# Altium PCB MICROMOUSE.PcbDoc
Units mm, origin at the board's own origin, x right, y up, seen from the top; angles counter-clockwise.
Board outline 70 x 91.65 mm, 2 copper layers (Top Layer, Bottom Layer); 84 components, 67 nets, 270 pads, 90 vias.
Unrouted connection lines stored in the file: 35.
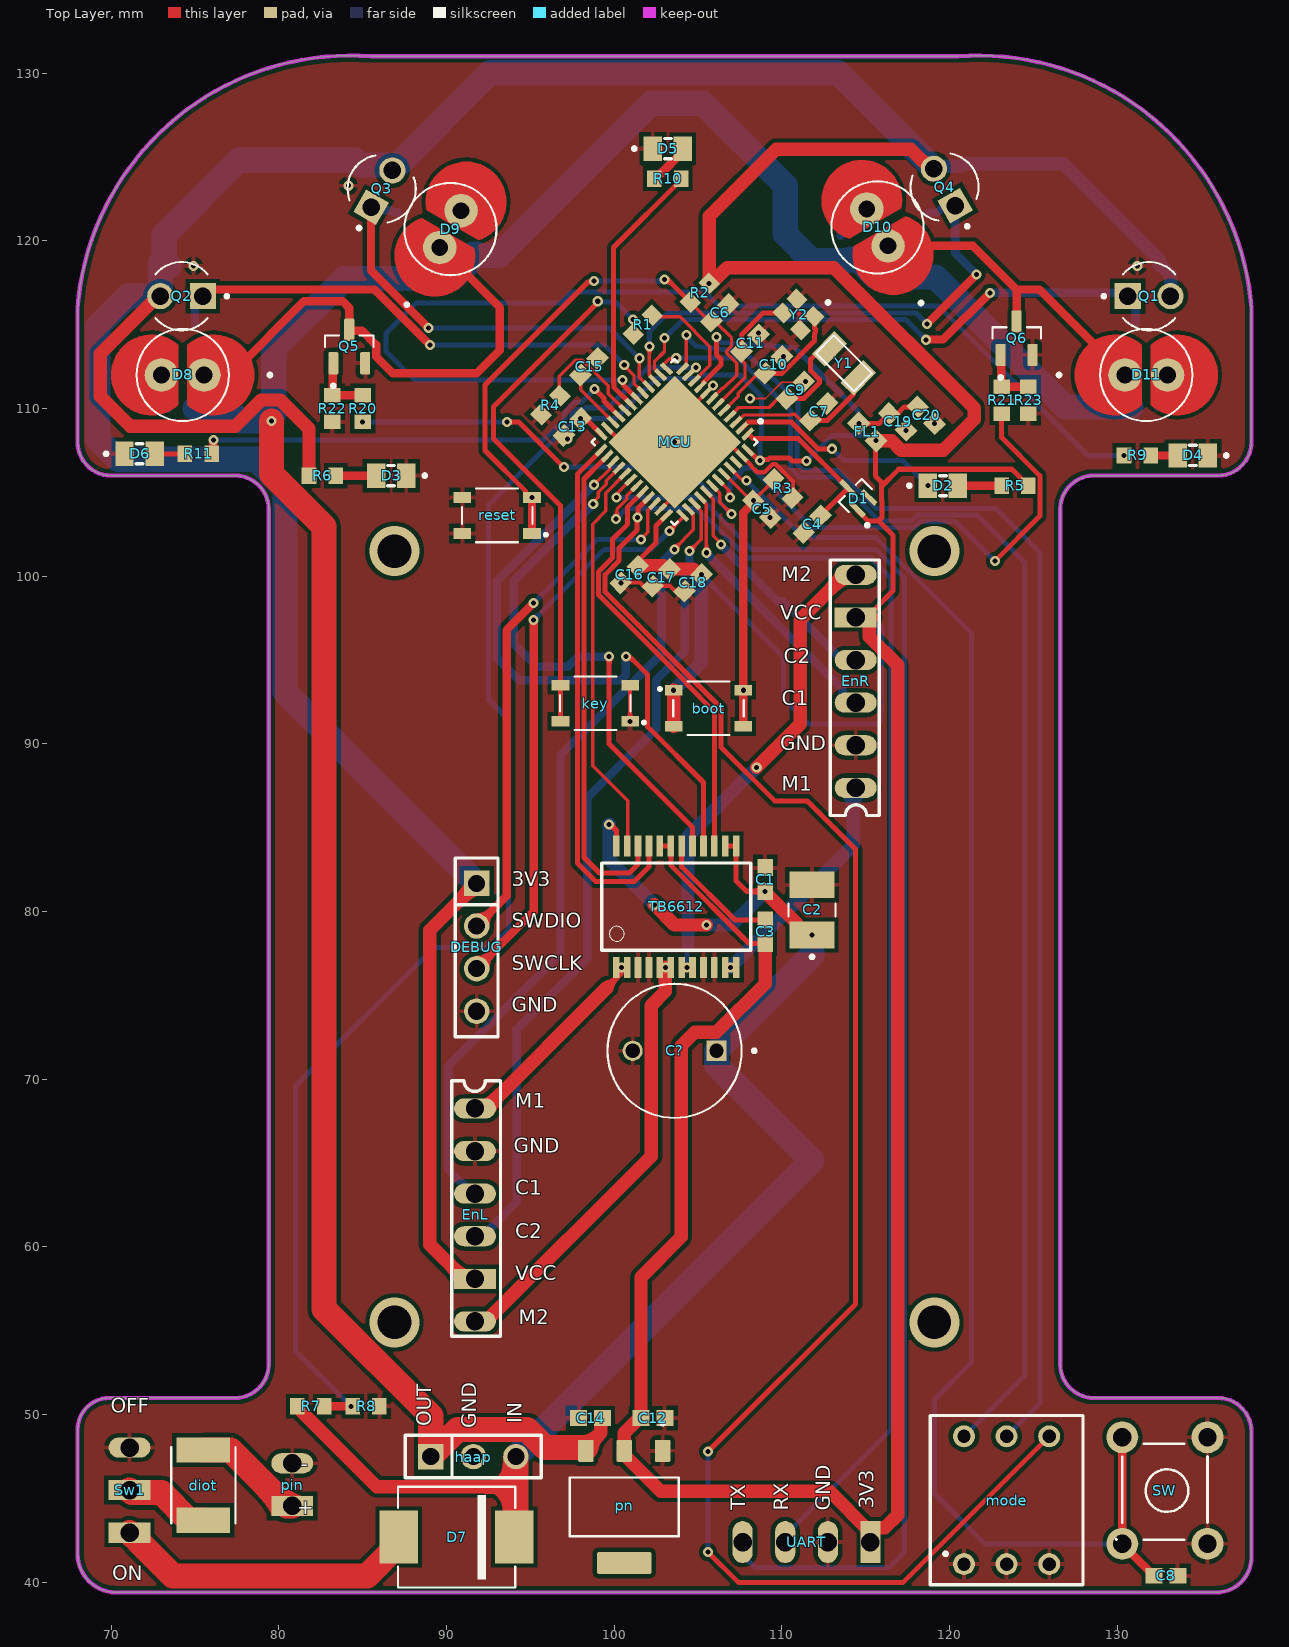
[diagram p0: Top Layer view]
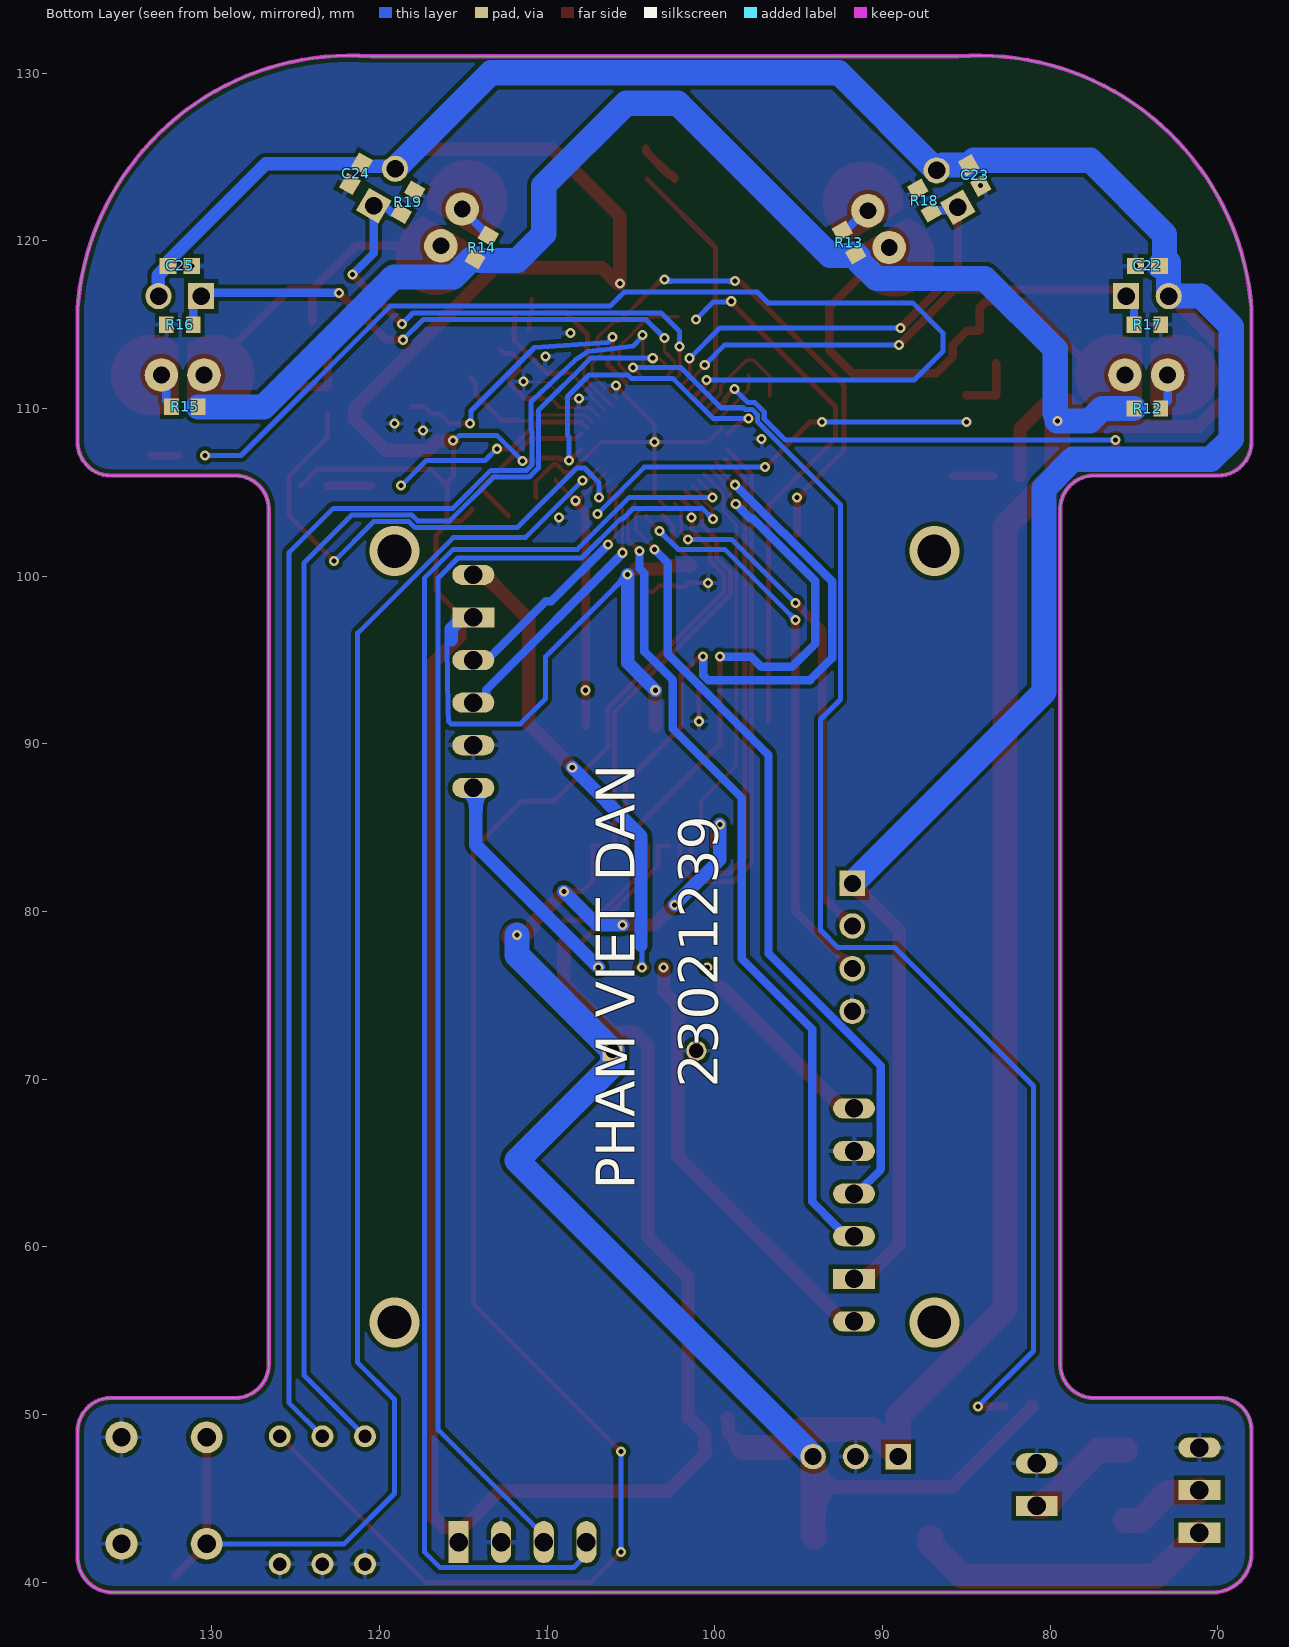
[diagram p1: Bottom Layer view, seen from below]
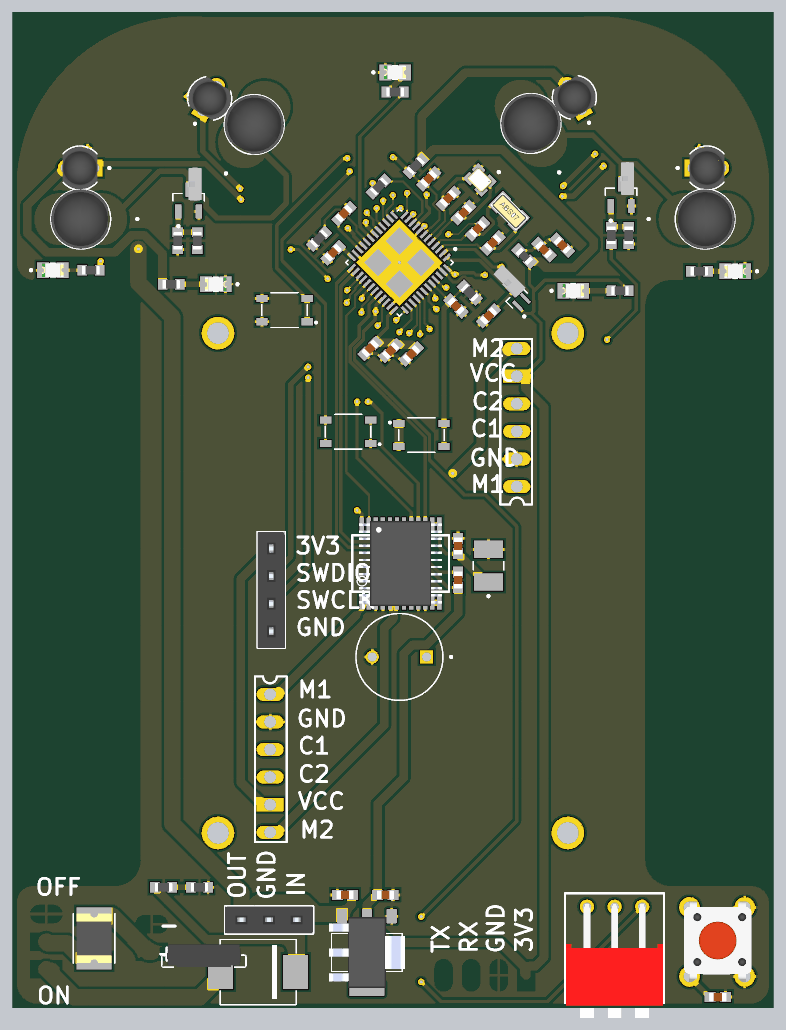
[diagram p2: 3D render of the assembled board from above, using the file's embedded part models]
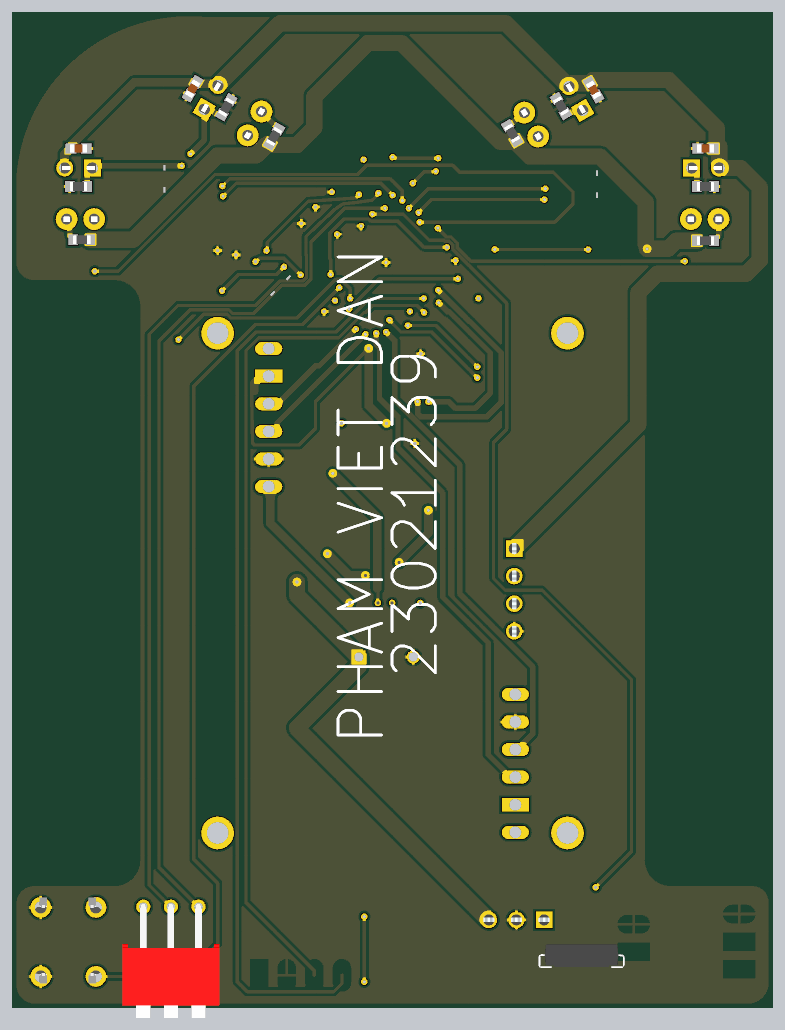
[diagram p3: 3D render of the assembled board from below, using the file's embedded part models]

## Layer stack, top to bottom
Top Solder: solder mask 0.0102, Solder Resist, Dk 3.5
Top Layer: signal copper 0.0356
Dielectric 1: dielectric 0.32, FR-4, Dk 4.8
Bottom Layer: signal copper 0.0356
Bottom Solder: solder mask 0.0102, Solder Resist, Dk 3.5

## Board outline
68,41.7 68,49.1 cw(c69.9,49.1) 69.9,51 77.4,51 ccw(c77.4,53) 79.4,53 79.4,104 ccw(c77.4,104) 77.4,106 70,106 cw(c70,108) 68,108 68,116 cw(c84.25,114.75) 85.5,131 120.5,131 cw(c121.75,114.75) 138,116 138,108 cw(c136,108) 136,106 128.6,106 ccw(c128.6,104) 126.6,104 126.6,53 ccw(c128.6,53) 128.6,51 136,51 cw(c136,49) 138,49 138,41.5 cw(c135.9,41.5) 135.9,39.4 70.3,39.4 cw(c70.3,41.7)

## Design rules (kind name [scope] priority, off if disabled: settings)
Clearance [All] p1: gap=0.1 ignorepadtopadclearanceinfootprint=FALSE except(0: Arc-Hole Track-Hole SMDPad-Hole THPad-Hole Via-Hole Text-Hole; 0.254: Arc-Fill Arc-Poly Arc-Region Track-Fill Track-Poly Track-Region SMDPad-Fill SMDPad-Poly SMDPad-Region THPad-Fill THPad-Poly THPad-Region Via-Fill Via-Poly Via-Region Fill-Fill Fill-Poly Fill-Region Poly-Poly Poly-Region Region-Region)
PolygonConnect [All] p1: connectstyle=Relief reliefconductorwidth=0.254 reliefentries=4 polygonreliefangle="90 Angle" airgapwidth=0.254
RoutingVias [All] p1: holewidth=0.711 width=1.27 viastyle="Through Hole" minholewidth=0.711 minwidth=1.27 maxholewidth=0.711 maxwidth=1.27
SolderMaskExpansion [All] p1: expansion=0.102 istentingtop=FALSE
Width signal [InNetClass('signal')] p1: maxlimit=0.5 minlimit=0.2 preferedwidth=0.3
Width gnd [InNetClass('gnd')] p2: maxlimit=2 minlimit=0.1 preferedwidth=0.254
Width power [InNetClass('power')] p3: maxlimit=1.5 minlimit=0.3 preferedwidth=0.8
30 further rules are at their usual default settings.

## Components (designator, comment, footprint, x,y, rotation, side; value= is the part's Value field where it differs from the comment)
boot "SKRPACE010" SW_SKRPACE010 105.625,92.125 r0 top
C1 "C1608C0G1H100C080AA" CAPC1608X90N 109,81.909 r90 top
C2 "6TPE220MAZB" CAP_6TPE220MAZB 111.8,80.1 r90 top
C3 "C1608C0G1H100C080AA" CAPC1608X90N 109,78.791 r270 top
C4 "C1608C0G1H100C080AA" CAPC1608X90N 111.8,103.1 r225 top
C5 "C1608C0G1H100C080AA" CAPC1608X90N 108.8,104 r315 top
C6 "C1608C0G1H100C080AA" CAPC1608X90N 106.3,115.7 r45 top
C7 "C1608C0G1H100C080AA" CAPC1608X90N 112.2,109.8 r225 top
C8 "C1608C0G1H100C080AA" CAPC1608X90N 132.9,40.4 r180 top
C9 "C1608C0G1H100C080AA" CAPC1608X90N 110.8,111.1 r225 top
C10 "C1608C0G1H100C080AA" CAPC1608X90N 109.5,112.6 r225 top
C11 "C1608C0G1H100C080AA" CAPC1608X90N 108.101,113.901 r225 top
C12 "C1608C0G1H100C080AA" CAPC1608X90N 102.309,49.8 r180 top
C13 "C1608C0G1H100C080AA" CAPC1608X90N 97.5,108.9 r45 top
C14 "C1608C0G1H100C080AA" CAPC1608X90N 98.591,49.8 r0 top
C15 "C1608C0G1H100C080AA" CAPC1608X90N 98.5,112.5 r45 top
C16 "C1608C0G1H100C080AA" CAPC1608X90N 100.899,100.099 r45 top
C17 "C1608C0G1H100C080AA" CAPC1608X90N 102.799,99.899 r45 top
C18 "C1608C0G1H100C080AA" CAPC1608X90N 104.699,99.599 r45 top
C19 "C1608C0G1H100C080AA" CAPC1608X90N 116.9,109.2 r135 top
C20 "C1608C0G1H100C080AA" CAPC1608X90N 118.6,109.6 r135 top
C22 "C1608C0G1H100C080AA" CAPC1608X90N 74.2,118.5 r0 bottom
C23 "C1608C0G1H100C080AA" CAPC1608X90N 84.5,123.9 r240 bottom
C24 "C1608C0G1H100C080AA" CAPC1608X90N 121.4,124 r300 bottom
C25 "C1608C0G1H100C080AA" CAPC1608X90N 131.9,118.5 r180 bottom
C? "ECA1CHG471B" CAPPRD500W60D800H1150 103.6,71.7 r180 top
D1 "BAT54CTA" SOT50P160X90-3N 114.383,104.81 r135 top
D2 "597-3305-607F" LEDC2012X70N 119.6,105.4 r0 top
D3 "597-3305-607F" LEDC2012X70N 86.7,106 r180 top
D4 "597-3305-607F" LEDC2012X70N 134.5,107.2 r180 top
D5 "597-3305-607F" LEDC2012X70N 103.2,125.5 r0 top
D6 "597-3305-607F" LEDC2012X70N 71.7,107.3 r0 top
D7 "SS34" DO214AB 90.6,42.7 r180 top
D8 "SFH_4545" DIO_SFH_4545 74.27,112 r180 top
D9 "SFH_4545" DIO_SFH_4545 90.235,120.7 r60 top
D10 "SFH_4545" DIO_SFH_4545 115.7,120.8 r120 top
D11 "SFH_4545" DIO_SFH_4545 131.73,112 r0 top
DEBUG "JP4" JP4-C1T 91.8,81.68 r270 top
diot "MF-MSMF150/24X-2" FUSER_MF-MSMF150/24X-2 75.5,45.8 r90 top
EnL "Encoder" Encoder 91.7,68.26 r0 top
EnR "Encoder" Encoder 114.4,87.38 r180 top
FL1 "BLM18AG601SN1D" BEADC1608X95N 115.1,108.6 r315 top
haap "JP3" JP3-C1T 89.06,47.5 r0 top
key "SKRPACE010" SW_SKRPACE010 98.875,92.425 r180 top
MCU "STM32F411CEU6" QFN50P700X700X60-49N 103.6,108 r225 top
mode "418117270903" 418117270903 123.4,44.9 r0 top
pin "Pin" Pin 149.38,41.385 r180 top
pn "AMS1117-3.3" SOT229P700X180-4N 100.6,44.5 r270 top
Q1 "TEFT4300" XDCR_TEFT4300 131.9,116.7 r0 top
Q2 "TEFT4300" XDCR_TEFT4300 74.2,116.7 r180 top
Q3 "TEFT4300" XDCR_TEFT4300 86.135,123.1 r60 top
Q4 "TEFT4300" XDCR_TEFT4300 119.7,123.2 r120 top
Q5 "BC817-40" SOT95P240X120-3N 84.2,113.7 r90 top
Q6 "BC817-40" SOT95P240X120-3N 124,114.2 r90 top
R1 "ERJ-P03J510V" RESC1608X55N 101.7,115 r45 top
R2 "ERJ-P03J510V" RESC1608X55N 105.1,116.9 r45 top
R3 "ERJ-P03J510V" RESC1608X55N 110.066,105.234 r315 top
R4 "ERJ-P03J510V" RESC1608X55N 96.2,110.2 r225 top
R5 "ERJ-P03J510V" RESC1608X55N 123.9,105.4 r180 top
R6 "ERJ-P03J510V" RESC1608X55N 82.6,106 r0 top
R7 "ERJ-P03J510V" RESC1608X55N 81.9,50.5 r0 top
R8 "ERJ-P03J510V" RESC1608X55N 85.2,50.5 r0 top
R9 "ERJ-P03J510V" RESC1608X55N 131.2,107.2 r180 top
R10 "ERJ-P03J510V" RESC1608X55N 103.2,123.7 r0 top
R11 "ERJ-P03J510V" RESC1608X55N 75.2,107.3 r0 top
R12 "ERJ-P03J510V" RESC1608X55N 74.2,110 r0 bottom
R13 "ERJ-P03J510V" RESC1608X55N 92,119.9 r240 bottom
R14 "ERJ-P03J510V" RESC1608X55N 113.9,119.6 r300 bottom
R15 "ERJ-P03J510V" RESC1608X55N 131.6,110.1 r180 bottom
R16 "ERJ-P03J510V" RESC1608X55N 131.9,115 r180 bottom
R17 "ERJ-P03J510V" RESC1608X55N 74.2,115 r0 bottom
R18 "ERJ-P03J510V" RESC1608X55N 87.5,122.4 r240 bottom
R19 "ERJ-P03J510V" RESC1608X55N 118.3,122.3 r300 bottom
R20 "ERJ-P03J510V" RESC1608X55N 85,110 r270 top
R21 "ERJ-P03J510V" RESC1608X55N 123.1,110.5 r270 top
R22 "ERJ-P03J510V" RESC1608X55N 83.2,110 r90 top
R23 "ERJ-P03J510V" RESC1608X55N 124.7,110.5 r90 top
reset "SKRPACE010" SW_SKRPACE010 93.025,103.625 r180 top
SW "SW" SW4 135.38,48.65 r270 top value="Button chip 4 pin"
Sw1 "Switch" Switch 131.566,288.324 r180 top
TB6612 "TB6612FNG" SSOP24 103.7,80.3 r0 top
UART "Pin4x" Pin4x 177.213,500.374 r270 top
Y1 "ABS07-LR-32.768KHZ-6-T" XTAL320X150X90 113.7,112.7 r315 top
Y2 "FA-128_25.0000MF10Z-AC" XTAL_FA-128_25.0000MF10Z-AC 111,115.6 r225 top

## Footprints (in the part's own frame and the unit in brackets; to place one, negate y for a bottom-side part, rotate by r counter-clockwise, add the part's x,y. Pads: shape width x height; smd on the part's side, far side on the other; paste and mask are expansions set on the pad)
418117270903 [mm]
  round 1.308 hole 0.8: 1(-2.54,-3.81) 2(0,-3.81) 3(2.54,-3.81) A1(-2.54,3.81) A2(0,3.81) A3(2.54,3.81)
  silkscreen extent -4.56,-5.05 4.56,5.05, body extent -4.46,-6.45 4.46,4.1, height 4.95
BEADC1608X95N [mm]
  rect 1x0.97 smd: 1(-0.735,0) 2(0.735,0)
  body extent -0.8,-0.4 0.8,0.4, height 0.95
CAP_6TPE220MAZB [mm]
  rect 1.6x2.7 smd: 1(-1.5,0) 2(1.5,0)
  silkscreen extent -2.9,-1.4 0.38,1.4
CAPC1608X90N [mm]
  rect 1.01x0.93 smd: 1(-0.709,0) 2(0.709,0)
  body extent -0.8,-0.4 0.8,0.4, height 0.9
CAPPRD500W60D800H1150 [mm]
  round 1.2 hole 0.85: N(2.5,0)
  rect 1.2x1.2 hole 0.85: P(-2.5,0)
  silkscreen extent -4.85,-4 4,4
DIO_SFH_4545 [mm]
  round 2 hole 1: A(1.27,0) C(-1.27,0)
  Top Layer region: -1.768,2.399 -1.71,2.396 -1.652,2.392 -1.593,2.387 -1.535,2.38 -1.478,2.371 -1.42,2.361 -1.363,2.35 -1.306,2.337 -1.249,2.323 -1.193,2.307 -1.137,2.29 -1.081,2.272 -1.026,2.252 -0.972,2.231 -0.918,2.209 -0.864,2.185 -0.812,2.16 -0.76,2.133 -0.708,2.105 -0.657,2.076 -0.608,2.046 -0.558,2.014 -0.51,1.982 -0.462,1.948 -0.416,1.912 -0.37,1.876 -0.325,1.839 -0.27,1.79 -0.27,0.06 -0.27,-1.79 -0.325,-1.839 -0.37,-1.876 -0.416,-1.912 -0.462,-1.948 -0.51,-1.982 -0.558,-2.014 -0.608,-2.046 -0.657,-2.076 -0.708,-2.105 -0.76,-2.133 -0.812,-2.16 -0.864,-2.185 -0.918,-2.209 -0.972,-2.231 -1.026,-2.252 -1.081,-2.272 -1.137,-2.29 -1.193,-2.307 -1.249,-2.323 -1.306,-2.337 -1.363,-2.35 -1.42,-2.361 -1.478,-2.371 -1.535,-2.38 -1.593,-2.387 -1.652,-2.392 -1.71,-2.396 -1.768,-2.399 -1.827,-2.4 -1.895,-2.4 -2.028,-2.394 -2.152,-2.383 -2.275,-2.364 -2.398,-2.34 -2.519,-2.309 -2.638,-2.272 -2.755,-2.229 -2.869,-2.179 -2.981,-2.124 -3.09,-2.063 -3.195,-1.997 -3.297,-1.925 -3.396,-1.848 -3.49,-1.766 -3.579,-1.68 -3.664,-1.589 -3.745,-1.493 -3.82,-1.394 -3.89,-1.29 -3.954,-1.184 -4.013,-1.074 -4.066,-0.961 -4.114,-0.846 -4.155,-0.728 -4.19,-0.608 -4.219,-0.487 -4.241,-0.364 -4.257,-0.241 -4.267,-0.116 -4.27,0 -4.267,0.116 -4.257,0.241 -4.241,0.364 -4.219,0.487 -4.19,0.608 -4.155,0.728 -4.114,0.846 -4.066,0.961 -4.013,1.074 -3.954,1.184 -3.89,1.29 -3.82,1.394 -3.745,1.493 -3.664,1.589 -3.579,1.68 -3.49,1.766 -3.396,1.848 -3.297,1.925 -3.195,1.997 -3.09,2.063 -2.981,2.124 -2.869,2.179 -2.755,2.229 -2.638,2.272 -2.519,2.309 -2.398,2.34 -2.275,2.364 -2.152,2.383 -2.028,2.394 -1.895,2.4 -1.827,2.4
  Top Layer region: 2.028,2.394 2.152,2.383 2.275,2.364 2.398,2.34 2.519,2.309 2.638,2.272 2.755,2.229 2.869,2.179 2.981,2.124 3.09,2.063 3.195,1.997 3.297,1.925 3.396,1.848 3.49,1.766 3.579,1.68 3.664,1.589 3.745,1.493 3.82,1.394 3.89,1.29 3.954,1.184 4.013,1.074 4.066,0.961 4.114,0.846 4.155,0.728 4.19,0.608 4.219,0.487 4.241,0.364 4.257,0.241 4.267,0.116 4.27,0 4.267,-0.116 4.257,-0.241 4.241,-0.364 4.219,-0.487 4.19,-0.608 4.155,-0.728 4.114,-0.846 4.066,-0.961 4.013,-1.074 3.954,-1.184 3.89,-1.29 3.82,-1.394 3.745,-1.493 3.664,-1.589 3.579,-1.68 3.49,-1.766 3.396,-1.848 3.297,-1.925 3.195,-1.997 3.09,-2.063 2.981,-2.124 2.869,-2.179 2.755,-2.229 2.638,-2.272 2.519,-2.309 2.398,-2.34 2.275,-2.364 2.152,-2.383 2.028,-2.394 1.895,-2.4 1.827,-2.4 1.768,-2.399 1.71,-2.396 1.652,-2.392 1.593,-2.387 1.535,-2.38 1.478,-2.371 1.42,-2.361 1.363,-2.35 1.306,-2.337 1.249,-2.323 1.193,-2.307 1.137,-2.29 1.081,-2.272 1.026,-2.252 0.972,-2.231 0.918,-2.209 0.864,-2.185 0.812,-2.16 0.76,-2.133 0.708,-2.105 0.657,-2.076 0.608,-2.046 0.558,-2.014 0.51,-1.982 0.462,-1.948 0.416,-1.912 0.37,-1.876 0.325,-1.839 0.27,-1.79 0.27,0.06 0.27,1.79 0.325,1.839 0.37,1.876 0.416,1.912 0.462,1.948 0.51,1.982 0.558,2.014 0.608,2.046 0.657,2.076 0.708,2.105 0.76,2.133 0.812,2.16 0.864,2.185 0.918,2.209 0.972,2.231 1.026,2.252 1.081,2.272 1.137,2.29 1.193,2.307 1.249,2.323 1.306,2.337 1.363,2.35 1.42,2.361 1.478,2.371 1.535,2.38 1.593,2.387 1.652,2.392 1.71,2.396 1.768,2.399 1.827,2.4 1.895,2.4
  silkscreen extent -5.3,-2.75 2.75,2.75, body extent -2.5,-2.76 2.75,2.75, height 11.84
DO214AB [mm]
  rect 2.3x3.15 smd paste+0 mask+0.102: A(3.45,0) C(-3.45,0)
  silkscreen extent -3.5,-3 3.5,3, body extent 1.05,-2.58 8.95,-0.38, height 2.8
Encoder [mm]
  oval 2.5x1.2 hole 1.1: C1(0,-5.08) C2(0,-7.62) GND(0,-2.54) M1(0,0) M2(0,-12.7)
  rect 2.5x1.2 hole 1.1: VCC(0,-10.16)
  silkscreen extent -1.4,-13.59 1.52,1.65
FUSER_MF-MSMF150/24X-2 [mm]
  rect 1.5x3.2 smd: 1(-2.1,0) 2(2.1,0)
  silkscreen extent -2.27,-1.91 2.27,1.91, body extent -2.27,-1.62 2.27,1.62, height 0.85
JP3-C1T [mm] "3 row, straight, gold plating"
  rect 1.52x1.52 hole 1.02: 1(0,0)
  round 1.52 hole 1.02: 2(2.54,0) 3(5.08,0)
  silkscreen extent -1.52,-1.27 6.6,1.27, body extent -1.52,-1.25 6.6,1.25, height 8.51
JP4-C1T [mm] "4 row, straight, gold plating"
  rect 1.52x1.52 hole 1.02: 1(0,0)
  round 1.52 hole 1.02: 2(2.54,0) 3(5.08,0) 4(7.62,0)
  silkscreen extent -1.52,-1.27 9.14,1.27, body extent -1.52,-1.25 9.14,1.25, height 8.51
LEDC2012X70N [mm]
  rect 1.1x1.45 smd: A(0.9,0) C(-0.9,0)
  silkscreen extent -2.1,-0.6 0.2,0.6, body extent -1,-0.63 1,0.63, height 0.7
Pin [mm]
  rect 2.5x1.2 hole 1.1: 1(68.58,-3.175)
  oval 2.5x1.2 hole 1.1: 2(68.58,-5.715)
  body extent 65.62,-8.32 71.37,-0.82, height 7
Pin4x [mm]
  rect 2.5x1.2 hole 1.1: 1(457.974,-61.933)
  oval 2.5x1.2 hole 1.1: 2(457.974,-64.473) 3(457.974,-67.013) 4(457.974,-69.553)
  body extent 456.71,-70.72 459.21,-60.72, height 9
QFN50P700X700X60-49N [mm]
  rrect25% 0.87x0.27 smd: 1(-3.43,2.75) 2(-3.43,2.25) 3(-3.43,1.75) 4(-3.43,1.25) 5(-3.43,0.75) 6(-3.43,0.25) 7(-3.43,-0.25) 8(-3.43,-0.75) 9(-3.43,-1.25) 10(-3.43,-1.75) 11(-3.43,-2.25) 12(-3.43,-2.75) 25(3.43,-2.75) 26(3.43,-2.25) 27(3.43,-1.75) 28(3.43,-1.25) 29(3.43,-0.75) 30(3.43,-0.25) 31(3.43,0.25) 32(3.43,0.75) 33(3.43,1.25) 34(3.43,1.75) 35(3.43,2.25) 36(3.43,2.75)
  rrect25% 0.27x0.87 smd: 13(-2.75,-3.43) 14(-2.25,-3.43) 15(-1.75,-3.43) 16(-1.25,-3.43) 17(-0.75,-3.43) 18(-0.25,-3.43) 19(0.25,-3.43) 20(0.75,-3.43) 21(1.25,-3.43) 22(1.75,-3.43) 23(2.25,-3.43) 24(2.75,-3.43) 37(2.75,3.43) 38(2.25,3.43) 39(1.75,3.43) 40(1.25,3.43) 41(0.75,3.43) 42(0.25,3.43) 43(-0.25,3.43) 44(-0.75,3.43) 45(-1.25,3.43) 46(-1.75,3.43) 47(-2.25,3.43) 48(-2.75,3.43)
  rect 5.6x5.6 smd paste-4: 49(0,0)
  silkscreen extent -4.6,-3.5 3.5,3.5
RESC1608X55N [mm]
  rect 0.87x0.98 smd: 1(-0.8,0) 2(0.8,0)
  body extent -0.8,-0.4 0.8,0.4, height 0.45
SOT50P160X90-3N [mm]
  rect 1.16x0.3 smd paste+0 mask+0.102: 1(-0.655,0.5) 2(-0.655,-0.5) 3(0.655,0)
  silkscreen extent -1.85,-0.97 0.43,0.97, body extent 0,-1.2 3.04,0.1, height 2
SOT95P240X120-3N [mm]
  rrect25% 1.32x0.6 smd paste+0 mask+0.102: 1(-1,0.95) 2(-1,-0.95) 3(1,0)
  silkscreen extent -2.45,-1.45 0.65,1.45, body extent 0,-1.2 3.04,0.1, height 2
SOT229P700X180-4N [mm]
  rrect15% 1.31x0.93 smd: 1(-3.345,2.29) 2(-3.345,0) 3(-3.345,-2.29)
  rrect15% 1.31x3.24 smd: 4(3.345,0)
  silkscreen extent -5.1,-3.25 1.75,3.25, body extent -3.25,-3.5 3.25,3.5, height 1.8
SSOP24 [mm]
  rect 0.4x1.25 smd: 1(-3.575,-3.625) 2(-2.925,-3.625) 3(-2.275,-3.625) 4(-1.625,-3.625) 5(-0.975,-3.625) 6(-0.325,-3.625) 7(0.325,-3.625) 8(0.975,-3.625) 9(1.625,-3.625) 10(2.275,-3.625) 11(2.925,-3.625) 12(3.575,-3.625) 13(3.575,3.625) 14(2.925,3.625) 15(2.275,3.625) 16(1.625,3.625) 17(0.975,3.625) 18(0.325,3.625) 19(-0.325,3.625) 20(-0.975,3.625) 21(-1.625,3.625) 22(-2.275,3.625) 23(-2.925,3.625) 24(-3.575,3.625)
  silkscreen extent -4.45,-2.6 4.45,2.6, body extent -3.8,-3.9 3.8,3.9, height 1.6
SW4 [mm]
  round 1.905 hole 1.1: 1(0,0) 2(6.35,-5.08) 3(6.35,0) 4(0,-5.08)
  silkscreen extent 0.38,-5.46 6.1,0, body extent -0.9,-5.59 7,0.61, height 7
SW_SKRPACE010 [mm]
  rect 1.05x0.65 smd: 1(-2.075,1.075) 2(2.075,1.075) 3(-2.075,-1.075) 4(2.075,-1.075)
  silkscreen extent -3.01,-1.6 2.1,1.6
Switch [mm]
  rect 2.5x1.2 hole 1.1: 1(60.466,245.364) 2(60.466,242.824)
  oval 2.5x1.2 hole 1.1: 3(60.466,240.284)
  body extent 58.51,238.65 62.36,247.26, height 5.45
XDCR_TEFT4300 [mm]
  round 1.56 hole 1.04: C(1.27,0)
  rect 1.56x1.56 / inner round 1.56 / far side rect 1.56x1.56 hole 1.04: E(-1.27,0)
  silkscreen extent -2.8,-2.03 1.55,2.03, body extent -1.6,-1.95 1.6,1.95, height 6.1
XTAL320X150X90 [mil]
  rect 43x75 smd: 1(-48,0) 2(48,0)
  silkscreen extent -63,-30 63,30, body extent -63,-29 63,29, height 35
XTAL_FA-128_25.0000MF10Z-AC [mm]
  rect 0.85x0.95 smd: 1(-0.575,0.725) 2(-0.575,-0.725) 3(0.575,-0.725) 4(0.575,0.725)
  silkscreen extent -1.85,0.63 -1.65,0.82, body extent -0.8,-1 0.8,1, height 0.5

## Part data
boot key reset: "Switch Tactile N.O. SPST Button J-Bend 0.05A 16VDC 2.55N SMD Automotive T/R", Package=None, Availability=Good, Check_prices=https://www.snapeda.com/parts/SKRPACE010/ALPS/view-part/376136/?ref=eda, MF=ALPS, MP=SKRPACE010, Price=None, SnapEDA_Link=https://www.snapeda.com/parts/SKRPACE010/ALPS/view-part/376136/?ref=snap
C1 C3 C4 C5 C6 C7 C8 C9 C10 C11 C12 C13 C14 C15 C16 C17 C18 C19 C20 C22 C23 C24 C25: "C Series 0603 10 pF 50 V Â±0.25 pF Tolerance C0G SMT Multilayer Ceramic Capacitor", Package="1608 TDK", Check_prices=https://www.snapeda.com/parts/C1608C0G1H100C080AA/TDK/view-part/?ref=eda, MF=TDK, MP=C1608C0G1H100C080AA, SnapEDA_Link=https://www.snapeda.com/parts/C1608C0G1H100C080AA/TDK/view-part/?ref=snap
C2: Package=None, Availability=Unavailable, MP=6TPE220MAZB, Price=None
C?: "NHG-A", Package=None, Availability=Unavailable, MP=ECA1CHG471B, Price=None
D1: "200mA 30V Schottky Barrier Diode SOT-23", Package="SOT-23 Diodes Inc.", Check_prices=https://www.snapeda.com/parts/BAT54CTA/Diodes+Inc./view-part/?ref=eda, MF="Diodes Inc.", MP=BAT54CTA, SnapEDA_Link=https://www.snapeda.com/parts/BAT54CTA/Diodes+Inc./view-part/?ref=snap
D2 D3 D4 D5 D6: "LED Uni-Color Green 4-Pin Chip 0805 T/R", Package=None, Availability=Unavailable, MP=597-3305-607F, Price=None
D7: "Diode Schottky 40 V 3A Surface Mount SMA", Package="SMC-2 ON Semiconductor", Check_prices=https://www.snapeda.com/parts/SS34/MDD/view-part/?ref=eda, MF=MDD, MP=SS34, SnapEDA_Link=https://www.snapeda.com/parts/SS34/MDD/view-part/?ref=snap
D8 D9 D10 D11: "Infrared (IR) Emitter 950nm 1.5V 100mA 550mW/sr @ 100mA 10Â° Radial", Package=None, Check_prices=https://www.snapeda.com/parts/SFH%204545/OSRAM/view-part/?ref=eda, MF="OSRAM Opto", MP="SFH 4545", SnapEDA_Link=https://www.snapeda.com/parts/SFH%204545/OSRAM/view-part/?ref=snap
DEBUG: "WR-PHD 2.54 mm Angled Socket Header", Manufacturer="W¨¹rth Elektronik eiSos GmbH", partNo=613004143121, ComponentLink1 Description=Manufacturer, ComponentLink1URL=http://www.we-online.com, ComponentLink2 Description=Datasheet, ComponentLink2URL=http://katalog.we-online.de/em/datasheet/6130xx143121.pdf, Created by="Karrer Zheng", Created Date="29 March 2013", NoPins=04
diot: "Polymeric PTC Resettable Fuse 24V 1.5 A Ih Surface Mount 1812 (4532 Metric), Concave", Package="1812 Bourns", Check_prices=https://www.snapeda.com/parts/MF-MSMF150/24X-2/Bourns/view-part/?ref=eda, Digi-Key_Part_Number=MF-MSMF150/24X-2TR-ND, MF=Bourns, MP=MF-MSMF150/24X-2, Purchase-URL=https://pricing.snapeda.com/search/part/MF-MSMF150/24X-2/?ref=eda, SnapEDA_Link=https://www.snapeda.com/parts/MF-MSMF150/24X-2/Bourns/view-part/?ref=snap
FL1: "600 Ohms @ 100 MHz 1 - Ferrite Bead 0603 (1608 Metric) 500mA 380mOhm", Package="1608 Murata", Availability="In Stock", Check_prices=https://www.snapeda.com/parts/BLM18AG601SN1D/Murata/view-part/?ref=eda, MF=Murata, MP=BLM18AG601SN1D, Price=None, Purchase-URL=https://pricing.snapeda.com/search/part/BLM18AG601SN1D/?ref=eda, SnapEDA_Link=https://www.snapeda.com/parts/BLM18AG601SN1D/Murata/view-part/?ref=snap
haap: "WR-PHD 2.54 mm Angled Socket Header", Manufacturer="W¨¹rth Elektronik eiSos GmbH", partNo=613003143121, ComponentLink1 Description=Manufacturer, ComponentLink1URL=http://www.we-online.com, ComponentLink2 Description=Datasheet, ComponentLink2URL=http://katalog.we-online.de/em/datasheet/6130xx143121.pdf, Created by="Karrer Zheng", Created Date="29 March 2013", NoPins=03
MCU: "High-performance access line, ARM Cortex-M4 core with DSP and FPU, 512 Kbytes Flash, 100 MHz CPU, ART Accelerator", Package=None, Availability=Unavailable, MP=STM32F411CEU6, Price=None
mode: "Dip Switch SPST 3 Position Through Hole Slide (Standard) Actuator 25mA 24VDC", Package=None, Check_prices=https://www.snapeda.com/parts/418117270903/W%25C3%25BCrth+Elektronik+Midcom/view-part/?ref=eda, MF="WÃ¼rth Elektronik", MP=418117270903, SnapEDA_Link=https://www.snapeda.com/parts/418117270903/W%25C3%25BCrth+Elektronik+Midcom/view-part/?ref=snap
pn: "Sot223/Pkg 1-Amp 3.3-Volt Low Drop Out Voltage Regulatator", Package="SOT-223 Seeed Technology", Check_prices=https://www.snapeda.com/parts/AMS1117-3.3/Advanced+Monolithic+Systems/view-part/?ref=eda, MF="Advanced Monolithic Systems", MP=AMS1117-3.3, SnapEDA_Link=https://www.snapeda.com/parts/AMS1117-3.3/Advanced+Monolithic+Systems/view-part/?ref=snap
Q1 Q2 Q3 Q4: "Phototransistors 925nm Top View Radial, 3mm Dia (T-1)", Package=None, Check_prices=https://www.snapeda.com/parts/TEFT4300/Vishay/view-part/?ref=eda, MF="Vishay Semiconductor", MP=TEFT4300, SnapEDA_Link=https://www.snapeda.com/parts/TEFT4300/Vishay/view-part/?ref=snap
Q5 Q6: "BJT, SOT-23, 45V, 800mA, NPN, 0.31W, 150Â°C", Package="SOT-23 Diotec", Check_prices=https://www.snapeda.com/parts/BC817-40/Diotec/view-part/?ref=eda, MF="Diotec Semiconductor", MP=BC817-40, SnapEDA_Link=https://www.snapeda.com/parts/BC817-40/Diotec/view-part/?ref=snap
R1 R2 R3 R4 R5 R6 R7 R8 R9 R10 R11 R12 R13 R14 R15 R16 R17 R18 R19 R20 R21 R22 R23: "Anti-Surge Chip Resistor 0603 5%, 51ohm , T&R", Package="1608-2 Panasonic", Check_prices=https://www.snapeda.com/parts/ERJ-P03J510V/Panasonic/view-part/?ref=eda, MF=Panasonic, MP=ERJ-P03J510V, SnapEDA_Link=https://www.snapeda.com/parts/ERJ-P03J510V/Panasonic/view-part/?ref=snap
SW: library part SW4, "Switch button 4 pin"
TB6612: "- Motor Driver Power MOSFET Parallel 24-SSOP", Package=None, Check_prices=https://www.snapeda.com/parts/TB6612FNG/Toshiba/view-part/?ref=eda, MF=Toshiba, MP=TB6612FNG, SnapEDA_Link=https://www.snapeda.com/parts/TB6612FNG/Toshiba/view-part/?ref=snap
Y1: "32.768 kHz Â±20ppm Crystal 6pF 50 kOhms 2-SMD, No Lead", Package="SMD-2 Abracon", Check_prices=https://www.snapeda.com/parts/ABS07-LR-32.768KHZ-6-T/Abracon/view-part/?ref=eda, MF=Abracon, MP=ABS07-LR-32.768KHZ-6-T, SnapEDA_Link=https://www.snapeda.com/parts/ABS07-LR-32.768KHZ-6-T/Abracon/view-part/?ref=snap
Y2: "25 MHz Â±10ppm Crystal 9pF 80 Ohms 4-SMD, No Lead", Package="NON STANDARD-4 EPSON", Availability="In Stock", Check_prices=https://www.snapeda.com/parts/FA-128%2025.0000MF10Z-AC/EPSON/view-part/?ref=eda, MF=EPSON, MP="FA-128 25.0000MF10Z-AC", Price=None, Purchase-URL="https://pricing.snapeda.com/search/part/FA-128 25.0000MF10Z-AC/?ref=eda", SnapEDA_Link=https://www.snapeda.com/parts/FA-128%2025.0000MF10Z-AC/EPSON/view-part/?ref=snap

## Via types
v1: diameter 0.6, hole 0.3, Top Layer to Bottom Layer, 86 vias
v2: diameter 3, hole 2, Top Layer to Bottom Layer, 4 vias

## Nets (pads, with @x,y where several pads share a name; then routed paths per layer and width w, separated by ;. In a path a pad name is that pad's centre, name@x,y a point inside that pad or via, vN(x,y) a via of type N, cw(c..) or ccw(c..) an arc to the next point about the centre after c; other vN are vias at no path point)
3V3: boot.1 boot.3 C3.2 C12.2 C13.2 C16.2 C17.2 C18.2 C22.1 C23.1 C24.1 C25.1 D1.1 DEBUG.1 EnL.VCC EnR.VCC FL1.2 MCU.24 MCU.36 MCU.48 pn.2 Q1.C Q2.C Q3.C Q4.C R2.2 R5.1 R6.1 TB6612.19 TB6612.20 UART.1 | length 432.9
  Top Layer w0.3: v1(98.001,109.401) 98.299,109.401 99.219,108.481 MCU.24 ; C16.2 101.428,100.628 101.428,100.928 102.493,101.993 102.493,103.004 MCU.36 ; TB6612.20 TB6612.19 103.375,82.759 108.034,78.1 C3.2@108.982,78.1 ; MCU.48 107.991,107.519 108.553,106.957 108.643,106.957 v1(108.7,106.9) 108.757,106.957 109.188,106.957 109.289,107.058 110.425,107.058 110.622,106.861 v1(111.461,106.861) ; D1.1 114.52,103.965 114.509,103.954 114.509,103.921 115.127,103.304 115.765,103.304 ; EnR.VCC@115.05,97.54 115.5,97.99 115.5,98 116.63,99.13 116.63,102.44 115.765,103.304 ; v1(115.62,108.08) 115.571,107.655 115.571,105.974 115.941,105.604 115.941,105.355 ; R5.1 123.721,106.379 116.965,106.379 115.941,105.355 ; 115.765,103.304 115.966,103.505 115.966,104.499 115.941,104.525 115.941,105.355
  Top Layer w0.8: Q2.C 72.786,116.7 69.346,113.26 69.346,110.74 71.14,108.946 77.4,108.946 78.961,110.507 80.092,110.507 81.8,108.799 R6.1 ; EnL.VCC 91.05,58.1 89,60.15 89,78.88 DEBUG.1 ; pn.2@100.541,47.659 102.776,45.424 112.851,45.424 UART.1@115.28,42.995 ; pn.2 100.606,48.1 100.606,48.909 C12.2@101.495,49.798 ; C16.2@101.428,100.628 C17.2@102.923,100.628 ; C12.2 101.6,58.2 104,60.6 104,72 104.8,72.8 106.093,72.8 109,75.707 C3.2 C3.2@108.982,78.1 ; C17.2 103.328,100.428 104.723,100.428 ; boot.3 v1(103.55,93.2) ; UART.1@115.1,42.995 115.1,42.58 UART.1 115.28,43.05 115.48,43.25 116.13,43.25 116.9,44.02 116.9,94.706 115.206,96.399 115.206,97.34 115.006,97.54 EnR.VCC EnR.VCC@115.36,97.54 ; v1(115.62,108.08) 115.63,108.07 116.551,108.07 117.107,107.513 119.613,107.513 121.469,109.369 121.469,110.031 117.487,114.013 ; 117.486,114.013 113.099,118.4 106.727,118.4 105.754,117.427 105.705,117.427 v1(105.666,117.466) 105.666,121.466 109.67,125.47 117.689,125.47 118.859,124.3 Q4.C
  Bottom Layer w0.3: v1(98.001,109.401) 100.101,109.401 102.5,111.8 104.994,111.8 105.194,112 107.5,112 108.781,110.719 108.781,108.391 108.7,108.309 v1(108.7,106.9) ; v1(105.2,100.1) 110.1,95.2 110.1,92.7 111.6,91.2 115.724,91.2 115.844,91.32 115.883,91.376 115.9,92.108 115.969,95.784 115.969,96.033 115.793,96.209 115.719,96.209 ; v1(111.461,106.861) 113,108.4 115.219,108.4 115.539,108.08 v1(115.62,108.08)
  Bottom Layer w0.8: v1(103.55,93.2) 105.2,94.85 v1(105.2,100.1) ; EnR.VCC 115.05,97.54 115.719,96.871 115.719,96.209 ; Q4.C 119.21,124.445 C24.1@120.621,124.445 ; C24.1 121.066,124.594 126.774,124.594 132.504,118.864 132.504,118.565 132.569,118.5 C25.1 132.649,118.5 133.2,117.949 133.2,116.73 Q1.C
  Bottom Layer w1.5: 72.941,118.705 72.941,116.711 Q2.C 71,116.7 69.2,114.9 69.2,108.182 70.405,106.977 76.476,106.977 78.633,106.977 80.377,105.233 80.377,101.095 80.377,93.103 DEBUG.1 ; C22.1 73.173,118.818 73.173,120.373 77.606,124.806 84.563,124.806 C23.1 Q3.C@86.44,124.514 ; Q3.C 92.593,130.023 113.342,130.023 Q4.C
5V: C14.2 haap.1 pn.3 R12.2 R13.2 R14.2 R15.2 | length 153.6
  Top Layer w0.8: pn.3@98.31,48.035 99.195,48.92 99.195,49.735 99.26,49.8 C14.2
  Top Layer w1.5: v1(79.574,109.257) 79.574,106.099 82.7,102.973 82.7,56.3 89.06,49.94 haap.1 90.67,49.11 94.807,49.11 95.882,48.035 pn.3@98.31,48.035
  Bottom Layer w1.5: R12.2 76.915,110 77.659,109.257 v1(79.574,109.257) ; 79.7,109.7 79.7,113.544 83.906,117.75 90.366,117.75 91.45,118.834 91.45,119.057 R13.2 91.81,119.207 91.896,119.121 93.121,119.121 102.2,128.2 105.3,128.2 110.2,123.3 110.2,120.4 111.779,118.821 114.004,118.821 114.09,118.907 114.512,118.907 115.569,117.85 119.15,117.85 126.9,110.1 R15.2
7.4V: C1.1 C2.1 C?.P D7.C haap.3 R7.1 TB6612.13 TB6612.14 TB6612.24 | length 87.4
  Top Layer w0.3: v1(99.7,85.2) 99.781,85.2 100.081,84.9 100.1,84.9 100.125,84.875 TB6612.24 ; TB6612.14 TB6612.13 107.275,81.825 107.9,81.2 v1(109,81.2)
  Top Layer w0.8: R7.1 81.1,50.445 85.845,45.7 94.136,45.7 ; v1(102.4,80.4) 103.6,79.2 v1(105.5,79.2) ; C1.1 109,81.16 109.655,80.505 109.672,80.505 110.85,79.327 110.85,79 111.25,78.6 v1(111.8,78.6)
  Top Layer w1.5: D7.C 94.136,42.786 94.136,45.7 94.136,47.496 haap.3 ; v1(111.8,78.6) 111.95,78.6 C2.1@112,78.55
  Bottom Layer w0.8: v1(99.7,85.2) 99.7,83.1 v1(102.4,80.4) ; v1(105.5,79.2) 107,79.2 v1(109,81.2)
  Bottom Layer w1.5: haap.3 111.8,65.16 106.1,70.86 C?.P 111.8,77.4 v1(111.8,78.6)
A1: MCU.13 mode.A1 | length 83
  Top Layer w0.2: MCU.13 102.919,112.57 102.919,112.619 103.276,112.976 103.676,112.976 v1(103.7,113)
  Bottom Layer w0.3: v1(103.7,113) 107.4,113 110.511,109.889 110.511,106.468 111.068,105.911 113.189,105.911 115.8,103.3 117.72,103.3 118.07,103.65 121.65,103.65 124.5,100.8 124.5,52.35 mode.A1
A2: MCU.12 mode.A2 | length 84.2
  Top Layer w0.2: MCU.12 104.293,112.582 104.293,113.413 104.3,113.42 v1(104.3,114.386)
  Bottom Layer w0.3: v1(104.3,114.386) 104.3,114.305 104.677,113.927 104.677,113.915 104.802,113.79 104.828,113.765 104.853,113.739 106.216,113.542 107.566,113.4 108.294,112.91 110.866,110.513 110.87,110.509 110.958,110.421 110.958,108.708 110.911,108.662 110.911,106.633 111.233,106.311 113.355,106.311 115.616,104.05 122.75,104.05 125.4,101.4 125.4,50.71 mode.A2
A3: MCU.33 mode.A3 | length 99.6
  Top Layer w0.3: MCU.33 101.433,104.065 101.433,103.533 v1(101.4,103.5) 101.372,103.472 101.372,102.75 100.3,101.678 100.3,100.934 99.461,100.096 99.461,99.058 106.375,92.144 106.375,89.806 109.575,86.606 111.494,86.606 114.4,83.7 114.4,56.6 v1(105.6,47.8) ; v1(105.6,41.8) 107.4,40 117.23,40 mode.A3
  Bottom Layer w0.3: v1(105.6,41.8) v1(105.6,47.8)
AIN1: MCU.26 TB6612.21 | length 31.6
  Top Layer w0.3: 99.23,107.519 97.8,106.089 97.8,82.9 98.9,81.8 101.2,81.8 102.075,82.675 TB6612.21
AIN2: MCU.25 TB6612.22 | length 29.2
  Top Layer w0.3: 99.373,106.973 98.2,105.8 98.2,83.222 99.122,82.3 100.9,82.3 101.425,82.825 TB6612.22
BIN1: MCU.28 TB6612.17 | length 33
  Top Layer w0.2: v1(98.75,104.3) 98.75,104.408 99.05,104.708 99.05,105.006 99.532,105.488 99.532,105.7 MCU.28
  Top Layer w0.3: v1(99.7,95.2) 99.7,90 104.675,85.025 TB6612.17
  Bottom Layer w0.5: v1(98.75,104.3) 97.906,103.456 97.756,103.456 94,99.7 94,96 95.4,94.6 97.236,94.6 97.836,95.2 v1(99.7,95.2)
BIN2: MCU.27 TB6612.16 | length 37.4
  Top Layer w0.2: v1(98.791,105.453) 99.725,106.388 99.725,106.6 MCU.27
  Top Layer w0.3: v1(100.7,95.2) 100.757,95.143 100.985,95.143 102,94.127 102,91.022 105.325,87.697 TB6612.16
  Bottom Layer w0.5: v1(98.791,105.453) 95.9,102.562 95.862,102.562 93,99.7 93,95.111 94.311,93.8 100.4,93.8 100.7,94.1 v1(100.7,95.2)
BOOT: boot.2 boot.4 C5.1 MCU.44 R3.1 | length 17.9
  Top Layer w0.2: MCU.44 108.159,104.501 v1(108.299,104.501) 109.5,105.703 R3.1
  Top Layer w0.5: boot.4 v1(107.7,93.2) 107.7,103.796 108.327,104.423 C5.1@108.327,104.473
BUTTON: C8.2 MCU.45 SW.2 SW.4 | length 92.2
  Top Layer w0.2: MCU.45 107.591,105.777 107.823,105.777 v1(107.9,105.7)
  Top Layer w0.5: SW.4 SW.2 130.3,42.251 132.151,40.4 C8.2
  Bottom Layer w0.3: v1(107.9,105.7) 111.3,102.3 115.6,102.3 121.3,96.6 121.3,53.1 119.1,50.9 119.1,45.3 122.1,42.3 SW.2
D4: MCU.18 R9.2 | length 66.4
  Top Layer w0.3: v1(100.507,111.703) 100.557,111.652 100.557,111.396 MCU.18
  Bottom Layer w0.3: v1(100.507,111.703) 100.495,111.715 88.085,111.715 86.4,113.4 86.4,114.5 88.2,116.3 96.829,116.3 97.477,116.948 105.406,116.948 106.254,116.1 119.36,116.1 128.26,107.2 v1(130.4,107.2)
D5: MCU.19 R10.2 | length 15.6
  Top Layer w0.3: MCU.19 100,111.246 100,111.489 99.957,111.532 99.957,119.602 104,123.645 R10.2
D6: MCU.21 R11.2 | length 27.3
  Top Layer w0.3: v1(98.835,111.165) 99.388,110.612 99.388,110.444 MCU.21
  Top Layer w0.5: R11.2 76.081,107.381 76.081,108.108 v1(76.1,108.127)
  Bottom Layer w0.3: v1(76.1,108.127) 95.798,108.127 97.051,109.381 97.051,109.795 97.608,110.351 98.022,110.351 v1(98.835,111.165)
ENL1: EnL.C1 MCU.38 | length 47.7
  Top Layer w0.2: v1(103.6,101.6) 103.6,101.641 104.718,102.759 104.718,103.651 104.434,103.934 MCU.38
  Bottom Layer w0.5: EnL.C1 91.55,63.18 90.1,64.63 90.1,70.79 96.8,77.49 96.8,89.349 102.8,95.349 102.8,100.8 v1(103.6,101.6)
ENL2: EnL.C2 MCU.39 | length 49.7
  Top Layer w0.2: v1(104.5,101.5) 105.2,102.2 105.2,103.876 104.788,104.288 MCU.39
  Bottom Layer w0.5: EnL.C2 92.161,60.64 92.7,61.179 92.7,61.2 94.2,62.7 94.2,73 98.4,77.2 98.4,86.8 102.5,90.9 102.5,93.8 104.2,95.5 104.2,100.161 104.489,100.45 104.489,101.489 v1(104.5,101.5)
ENR1: EnR.C1 MCU.40 | length 16.3
  Top Layer w0.2: MCU.40 105.141,104.641 105.5,104.283 v1(105.5,101.4)
  Bottom Layer w0.5: v1(105.5,101.4) 105.519,101.381 105.519,101.341 113.62,93.24 113.62,92.783 113.944,92.46 EnR.C1
ENR2: EnR.C2 MCU.41 | length 14.4
  Top Layer w0.2: MCU.41 105.495,104.995 105.9,104.59 105.9,102.4 106.378,101.922 v1(106.378,101.878)
  Bottom Layer w0.5: v1(106.378,101.878) 109.76,98.497 110.085,98.497 113.581,95 EnR.C2
GND: C1.2 C2.2 C4.2 C5.2 C6.2 C7.1 C8.1 C9.1 C10.1 C11.1 C12.1 C13.1 C14.1 C15.2 C16.1 C17.1 C18.1 C19.1 C20.1 C22.2 C23.2 C24.2 C25.2 C?.N D3.C D4.C D5.C D6.C DEBUG.4 EnL.GND EnR.GND haap.2 key.1 key.3 MCU.8 MCU.23 MCU.35 MCU.47 MCU.49 mode.1 mode.2 mode.3 pin.2 pn.1 Q5.2 Q6.2 R3.2 R4.2 R8.2 R16.1 R17.1 R18.1 R19.1 R22.1 R23.1 reset.2 reset.4 Sw1.3 SW.1 SW.3 TB6612.3 TB6612.4 TB6612.9 TB6612.10 UART.2 Y2.2 Y2.4 | length 34.4
  Top Layer w0.1: v1(108.1,110.6) 109.024,110.6 109.997,111.573 111.373,111.573 v1(111.4,111.6)
  Top Layer w0.254: MCU.23 100.418,108 v1(103.6,108) ; v1(100.397,99.597) 100.426,99.626 101.534,99.626 101.791,99.369 102.269,99.369 C17.1 102.326,99.426 103.334,99.426 103.691,99.069 104.169,99.069 C18.1 ; v1(100.95,91.35) key.3 ; MCU.35 103.6,104.818 v1(103.6,108) ; v1(105.899,111.36) MCU.8 103.6,109.061 v1(103.6,108) ; R3.2 110.67,104.708 110.67,105.644 109.633,106.681 109.445,106.681 108.964,106.2 108.527,106.2 108.193,106.534 108.193,106.589 MCU.47 106.782,108 v1(103.6,108) ; Y2.2 110.929,116.484 110.929,115.78 111.056,115.653 111.056,115.435 111.071,115.42 111.071,114.716 Y2.4
  other v1: 109.301,103.499 97.206,108.192 117.4,108.7 119.1,109.1 110.1,113.1 108.6,114.5 74.909,118.5 131.191,118.5 84.146,123.286
key: MCU.10 R1.2 | length 6.7
  Top Layer w0.2: R1.2@102.166,115.466 103.927,115.466 105.7,113.693 105.7,112.575 MCU.10
ML1: EnL.M1 TB6612.1 TB6612.2 | length 12.8
  Top Layer w0.3: 99.6,75.5 100.393,76.293 100.393,76.618 v1(100.45,76.675) TB6612.2
  Top Layer w0.8: EnL.M1 92.36,68.26 99.6,75.5
ML2: EnL.M2 TB6612.5 TB6612.6 | length 26.2
  Top Layer w0.8: EnL.M2 92.35,55.56 102.2,65.41 102.2,74.4 103.05,75.25 v1(103.05,76.675)
MR1: EnR.M1 TB6612.11 TB6612.12 | length 14.4
  Top Layer w0.3: TB6612.11 v1(106.95,76.675) TB6612.12
  Bottom Layer w0.8: v1(106.95,76.675) 114.249,83.974 114.249,87.229 EnR.M1
MR2: EnR.M2 TB6612.7 TB6612.8 | length 28.6
  Top Layer w0.3: TB6612.7 v1(104.35,76.675) TB6612.8
  Top Layer w0.8: v1(108.5,88.6) 111.087,91.187 111.087,97.417 113.75,100.08 EnR.M2
  Bottom Layer w0.3: v1(104.35,76.675) 104.35,77.95 104.4,78
  Bottom Layer w0.8: 104.4,78 104.4,84.5 v1(108.5,88.6)
NetC3_1: C3.1 TB6612.18 | length 7.5
  Top Layer w0.3: TB6612.18 104.025,82.675 107.2,79.5 C3.1
NetC7_2: C7.2 MCU.3 Y1.2 | length 9.1
  Top Layer w0.2: MCU.3 107.312,109.188 107.737,109.613 110.553,109.613 110.6,109.659 110.765,109.659 111.154,109.27 111.541,109.27 C7.2@111.67,109.27
  Top Layer w0.3: C7.2 111.727,109.327 112.172,109.327 112.201,109.299 112.715,109.299 114.275,110.858 114.275,111.551 Y1.2
NetC9_2: C9.2 MCU.4 Y1.1 | length 9.2
  Top Layer w0.2: MCU.4 107.429,110.061 107.899,110.061 ; 107.899,110.061 109.245,110.061 109.782,110.599 C9.2
  Top Layer w0.3: C9.2 110.327,110.627 110.772,110.627 110.801,110.599 111.31,110.599 112.237,111.526 112.237,111.733 111.72,112.25 111.72,112.945 112.05,113.275 112.551,113.275 Y1.1
NetC10_2: C10.2 MCU.5 Y2.1 | length 8.8
  Top Layer w0.2: MCU.5 107.4,110.739 107.4,110.907 108.592,112.099 C10.2
  Top Layer w0.3: C10.2 109.027,112.127 109.472,112.127 109.501,112.099 110.015,112.099 111.937,114.021 111.937,114.487 111.992,114.542 111.992,114.749 111.937,114.804 111.937,115.052 111.955,115.07 111.955,115.459 Y2.1
NetC11_2: C11.2 MCU.6 Y2.3 | length 8
  Top Layer w0.2: MCU.6 107.8,111.846 107.8,112.697 107.6,112.897 C11.2
  Top Layer w0.3: C11.2 107.628,113.428 107.628,113.874 107.6,113.902 107.6,114.417 108.889,115.706 Y2.3
NetC15_1: C15.1 MCU.22 | length 3.6
  Top Layer w0.2: C15.1 97.97,111.97 97.97,111.454 97.999,111.426 97.999,111.126 MCU.22
NetD2_A: D2.A R5.2 | length 2.6
  Top Layer w0.5: D2.A R5.2
NetD3_A: D3.A R6.2 | length 2.4
  Top Layer w0.5: R6.2 D3.A
NetD4_A: D4.A R9.1 | length 1.6
  Top Layer w0.5: R9.1 D4.A
NetD5_A: D5.A R10.1 | length 2.6
  Top Layer w0.5: R10.1 102.4,123.755 102.585,123.94 102.715,123.94 104.1,125.325 D5.A
NetD6_A: D6.A R11.1 | length 1.8
  Top Layer w0.3: D6.A R11.1
NetD7_A: D7.A Sw1.1 | length 18.5
  Top Layer w1.5: Sw1.1 71.25,42.81 71.6,42.81 71.6,42.46 73.683,40.377 85.252,40.377 87.15,42.275 D7.A
NetD8_A: D8.A R12.1 | length 2.2
  Bottom Layer w0.5: D8.A 73,110.455 73.4,110.055 R12.1
NetD8_C: D8.C D9.C Q5.3 | length 30.6
  Top Layer w0.5: D8.C 75.73,112.19 77.29,112.19 81.5,116.4 83.8,116.4 84.2,116 Q5.3 84.2,114.693 84.25,114.643 84.957,114.643 85.8,113.8 85.8,113.1 86.8,112.1 91.8,112.1 93.181,113.481 93.181,116.019 D9.C
NetD9_A: D9.A R13.1 | length 2
  Bottom Layer w0.5: D9.A 91.021,121.8 92.228,120.593 R13.1
NetD10_A: D10.A R14.1 | length 2.3
  Bottom Layer w0.5: R14.1 113.5,120.304 115.065,121.869 D10.A
NetD10_C: D10.C D11.C Q6.3 | length 19.2
  Top Layer w0.5: D10.C 121.4,119.7 124,117.1 ; Q6.3 124,117.1 ; D11.C 125.36,117.1 124,117.1
NetD11_A: D11.A R15.1 | length 2.1
  Bottom Layer w0.5: R15.1 132.4,110.155 132.713,110.468 132.713,111.713 D11.A
Netdiot_1: diot.1 Sw1.2 | length 5.1
  Top Layer w1.5: Sw1.2 71.25,45.35 73,45.35 74.65,43.7 diot.1
Netdiot_2: diot.2 pin.1 | length 6.7
  Top Layer w1.5: diot.2 77.11,47.9 80.45,44.56 pin.1
Netkey_2: key.2 key.4 R1.1 | length 31.9
  Top Layer w0.3: key.2 key.4 96.8,104.204 92.8,108.204 92.8,110.1 99.02,116.32 v1(99.02,116.398)
  Bottom Layer w0.3: v1(99.02,116.398) 99.059,116.359 100.075,116.359 v1(101.134,115.3)
NetQ5_1: Q5.1 R20.1 R22.2 | length 3.7
  Top Layer w0.5: Q5.1 83.225,112.675 83.225,110.825 R22.2 R20.1
NetQ6_1: Q6.1 R21.1 R23.2 | length 3.5
  Top Layer w0.5: Q6.1 123.075,113.175 123.075,111.325 R21.1 R23.2
NRST: C6.1 MCU.7 R2.1 reset.1 reset.3 | length 33.5
  Top Layer w0.2: R2.1 105.67,115.199 106.008,115.199 107,114.207 107,113.74 106.714,113.455 106.714,113.289 107.3,112.703 107.3,111.993 106.507,111.2 106.446,111.2 MCU.7
  Top Layer w0.3: v1(95.1,104.7) 94.9,104.7 94.725,104.875 94.725,105.075 92.3,107.5 92.3,111.4 98.443,117.543 98.743,117.543 v1(98.8,117.6) ; v1(103,117.7) 103.057,117.643 103.226,117.643 R2.1
  Top Layer w0.5: reset.1 v1(95.1,104.7)
  Bottom Layer w0.3: v1(98.8,117.6) 102.819,117.6 102.919,117.7 v1(103,117.7)
PB2: MCU.20 R4.1 | length 7
  Top Layer w0.2: R4.1 96.727,110.805 96.727,111.927 97.685,112.885 98.11,112.885 98.717,112.277 99.65,111.344 99.65,110.889 MCU.20
PC13: D2.C MCU.2 | length 12.8
  Top Layer w0.3: MCU.2 107.638,108.834 107.993,109.19 110.569,109.19 112.159,107.6 v1(113,107.6)
  Bottom Layer w0.3: v1(113,107.6) 113.7,106.9 117.2,106.9 v1(118.7,105.4)
PWMA: MCU.29 TB6612.23 | length 23.9
  Top Layer w0.2: MCU.29 99.5,104.961 99.5,103.9 98.711,103.111 98.711,88.689 100.8,86.6 100.8,83.95 TB6612.23
PWMB: MCU.32 TB6612.15 | length 25.1
  Top Layer w0.3: MCU.32 100.8,104.139 100.8,103.1 99.9,102.2 99.9,101.1 99.061,100.261 99.061,98.892 104.325,93.629 104.325,93.575 105.975,91.925 TB6612.15
Rpin: MCU.11 R7.2 R8.1 | length 81.2
  Top Layer w0.2: MCU.11 v1(104.866,112.45)
  Top Layer w0.5: R7.2 v1(84.3,50.5) R8.1
  Bottom Layer w0.3: v1(84.3,50.5) 81,53.8 81,69.6 89.25,77.85 92.65,77.85 93.7,78.9 93.7,91.45 92.5,92.65 92.5,104.264 97.451,109.215 97.451,109.629 97.774,109.951 98.188,109.951 98.282,110.046 99.628,110.046 102.031,112.45 v1(104.866,112.45)
RX: MCU.31 UART.3 | length 81
  Top Layer w0.2: v1(100.1,103.4) 100.166,103.466 100.166,104 100.754,104.588 100.754,104.8 MCU.31
  Bottom Layer w0.3: v1(100.1,103.4) 100.75,104.05 104.85,104.05 105.5,103.4 105.634,103.4 107.947,101.087 115.311,101.087 116.5,99.898 116.5,49.1 110.767,43.367 110.761,43.367 110.2,42.806 UART.3
SCL: MCU.42 R20.2 | length 26.5
  Top Layer w0.2: MCU.42 106.3,104.946 106.3,104.407 v1(107.004,103.704)
  Top Layer w0.3: v1(93.6,109.2) 94.3,109.2 v1(97,106.5)
  Bottom Layer w0.3: v1(85,109.2) v1(93.6,109.2) ; v1(97,106.5) 104.207,106.5 v1(107.004,103.704)
SDA: MCU.43 R21.2 | length 31.8
  Top Layer w0.2: MCU.43 106.823,105.13 106.823,104.777 v1(106.9,104.7)
  Top Layer w0.3: v1(122.7,100.9) 125.385,103.585 125.385,105.994 123.1,108.279 R21.2
  Bottom Layer w0.3: v1(106.9,104.7) 106.9,105.578 107.772,106.45 108.228,106.45 111.778,102.9 117.886,102.9 118.236,103.25 120.35,103.25 v1(122.7,100.9)
SENFL: MCU.17 Q2.E R17.2 | length 31.2
  Top Layer w0.2: v1(100.6,112.6) 100.6,112.551 101.185,111.966 101.185,111.475 MCU.17
  Top Layer w0.5: Q2.E 75.87,117.1 85.719,117.1 v1(89.019,113.8)
  Bottom Layer w0.3: v1(89.019,113.8) 99.4,113.8 v1(100.6,112.6)
  Bottom Layer w0.5: R17.2 75,116.23 Q2.E
SENFR: MCU.14 Q1.E R16.2 | length 34.3
  Top Layer w0.2: MCU.14 102.766,112.034 102.4,112.4 102.4,112.8 103,113.4 v1(103,114.2)
  Top Layer w0.5: v1(118.6,114.1) 118.619,114.119 119.619,114.119 v1(122.4,116.9)
  Bottom Layer w0.3: v1(103,114.2) 104.1,115.3 117.4,115.3 v1(118.6,114.1)
  Bottom Layer w0.5: v1(122.4,116.9) 130.43,116.9 Q1.E 131.1,116.23 R16.2
SENL: MCU.16 Q3.E R18.2 | length 25.6
  Top Layer w0.2: v1(101.5,112.999) 101.5,111.868 MCU.16
  Top Layer w0.5: Q3.E 85.5,118.235 88.933,114.802 v1(88.936,114.802)
  Bottom Layer w0.3: v1(88.936,114.802) 88.938,114.8 99.699,114.8 v1(101.5,112.999)
  Bottom Layer w0.5: Q3.E 85.682,121.818 86.68,121.818 86.791,121.707 R18.2
SENR: MCU.15 Q4.E R19.2 | length 31
  Top Layer w0.2: v1(102.1,113.7) 102.1,112.024 102.412,111.712 MCU.15
  Top Layer w0.5: v1(118.659,115.041) 121.6,117.982 v1(121.6,118)
  Bottom Layer w0.3: v1(102.1,113.7) 102.1,114.6 103.2,115.7 118,115.7 v1(118.659,115.041)
  Bottom Layer w0.5: R19.2 118.783,121.69 119.292,121.69 119.701,122.1 Q4.E 120.335,119.265 v1(121.6,118)
SWCLK: DEBUG.3 MCU.37 | length 33.8
  Top Layer w0.2: v1(103.3,102.7) 104.131,103.531 104.131,103.58 MCU.37
  Top Layer w0.5: DEBUG.3 95.2,80 v1(95.2,97.4)
  Bottom Layer w0.3: v1(95.2,97.4) 99.4,101.6 102.2,101.6 v1(103.3,102.7)
SWDIO: DEBUG.2 MCU.34 | length 31.1
  Top Layer w0.2: v1(101.6,102.2) 101.6,102.217 102,102.617 102,103.925 MCU.34
  Top Layer w0.5: DEBUG.2 93.588,80.928 93.588,96.788 v1(95.2,98.4)
  Bottom Layer w0.3: v1(95.2,98.4) 99,102.2 v1(101.6,102.2)
TX: MCU.30 UART.4 | length 89.7
  Top Layer w0.2: v1(100.14,104.7) 100.217,104.777 100.217,104.97 MCU.30
  Bottom Layer w0.3: v1(100.14,104.7) 105.1,104.7 108.2,101.6 115.6,101.6 117.3,99.9 117.3,41.8 116.4,40.9 108.4,40.9 107.66,41.64 UART.4
VB: D1.2
VBAT: C4.1 D1.3 MCU.1 | length 9.6
  Top Layer w0.3: MCU.1 107.978,108.489 108,108.489 108.289,108.2 110.993,108.2 D1.3 113.946,105.246 C4.1
VREF+: C19.2 C20.2 FL1.1 MCU.9 | length 18.2
  Top Layer w0.3: MCU.9@105.332,111.521 105.332,111.571 106.364,112.603 106.364,112.95 106.1,113.214 v1(106.1,114.253) ; FL1.1 114.591,109.109 115.806,109.109 C19.2 116.427,109.673 116.872,109.673 117.301,110.101 117.597,110.101 117.625,110.13 118.07,110.13 C20.2
  Bottom Layer w0.3: v1(106.1,114.253) 106.288,114.036 106.295,114.028 106.382,113.942 110.766,113.634 110.845,113.555 114.543,109.857 114.543,109.157 v1(114.6,109.1)
pads on no net: MCU.46 pn.4
copper on no net:
  other v2: 86.9,55.5 119.1,55.5 86.9,101.5 119.1,101.5

## Polygon pours and split planes (outlines as drawn)
GND on Bottom Layer "NONET_L02_P-001" (solid, remove dead copper, pour order 0): 56.9,139.7 62.2,134.4 151.8,134.4 151.8,31 146.1,25.3 140.7,30.7 57.1,30.7
GND on Top Layer "NONET_L02_P-001" (solid, remove dead copper, pour order 1): 46.4,143.8 142.6,143.8 153.4,133 153.4,15.1 62.3,15.1 59.9,17.5

## Keep-outs
Keep-Out Layer:
  lines w0.254: 126.6,56 126.6,53 ; 126.6,57.5 126.6,63.5 ; 79.4,53 cw(c77.4,53) 77.4,51 69.9,51 ccw(c69.9,49.1) 68,49.1 68,43.2 68,41.7 ccw(c70.3,41.7) 70.3,39.4 135.9,39.4 ccw(c135.9,41.5) 138,41.5 138,49 ccw(c136,49) 136,51 128.9,51 128.6,51 cw(c128.6,53) 126.6,53 ; 79.4,53 79.4,55.5 ; 79.4,53 79.4,104 ccw(c77.4,104) 77.4,106 70,106 cw(c70,108) 68,108 68,116 cw(c84.25,114.75) 85.5,131 120.5,131 cw(c121.75,114.75) 138,116 138,108 cw(c136,108) 136,106 128.6,106 ccw(c128.6,104) 126.6,104 126.6,53 ; 79.4,55.5 79.4,55.5 ; 126.6,53 126.6,55.5 ; 126.6,55.5 126.6,55.5 ; 79.4,101.5 79.4,101.5

## Silkscreen, mask and mechanical layers (free items; w line width, h text height)
Top Overlay:
  text "M2" at 110,99.4 h1.5
  text "VCC" at 109.9,97.117 h1.5
  text "C2" at 110.1,94.517 h1.5
  text "C1" at 110,92.017 h1.5
  text "GND" at 109.9,89.318 h1.5
  text "M1" at 110,86.9 h1.5
  text "3V3" at 93.88,81.226 h1.5
  text "SWDIO" at 93.88,78.726 h1.5
  text "SWCLK" at 93.9,76.218 h1.5
  text "GND" at 93.9,73.718 h1.5
  text "M1" at 94.1,68 h1.5
  text "GND" at 94,65.318 h1.5
  text "C1" at 94.1,62.817 h1.5
  text "C2" at 94.1,60.217 h1.5
  text "VCC" at 94.1,57.717 h1.5
  text "M2" at 94.3,55.1 h1.5
  text "OFF" at 69.98,49.826 h1.5
  text "IN" at 94.8,49.5 h1.5 r90
  text "OUT" at 89.382,49.3 h1.5 r90
  text "GND" at 92.082,49.2 h1.5 r90
  text "-" at 81.3,46.343 h1.5
  text "3V3" at 115.774,44.38 h1.5 r90
  text "TX" at 108.1,44.3 h1.5 r90
  text "RX" at 110.692,44.28 h1.5 r90
  text "GND" at 113.174,44.28 h1.5 r90
  text "+" at 81.1,43.761 h1.5
  text "ON" at 70.08,39.826 h1.5
Bottom Overlay:
  text "23021239" at 99.048,69.5 h4 r270
  text "PHAM VIET DAN" at 104,63.4 h4 r270